# EAGLE board Anoloctive (EAGLE 9.6.2)
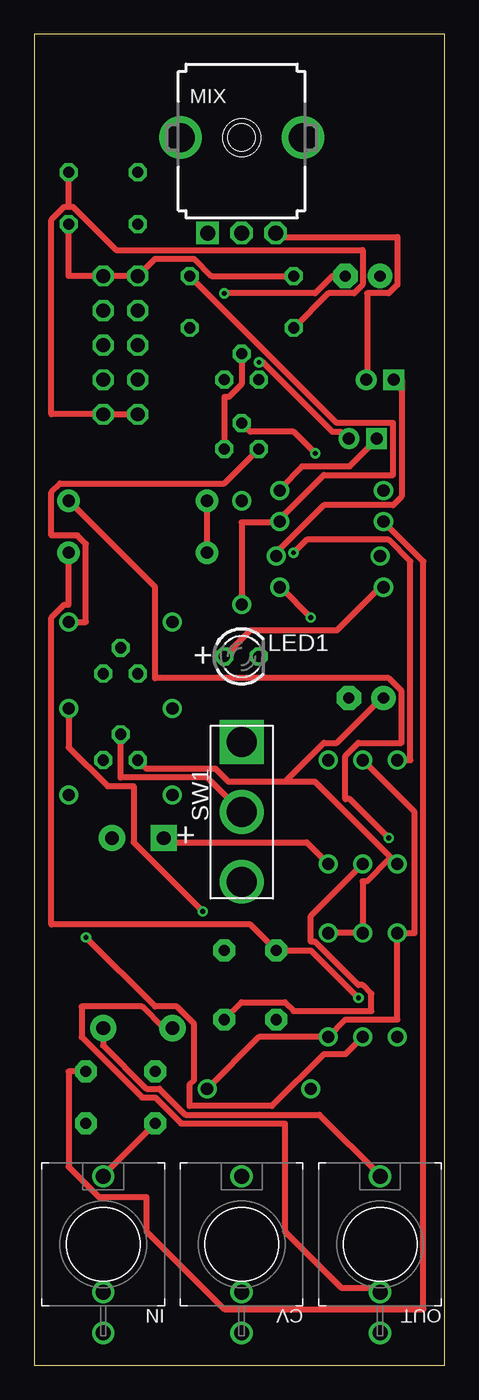
[diagram p0: board, top side]
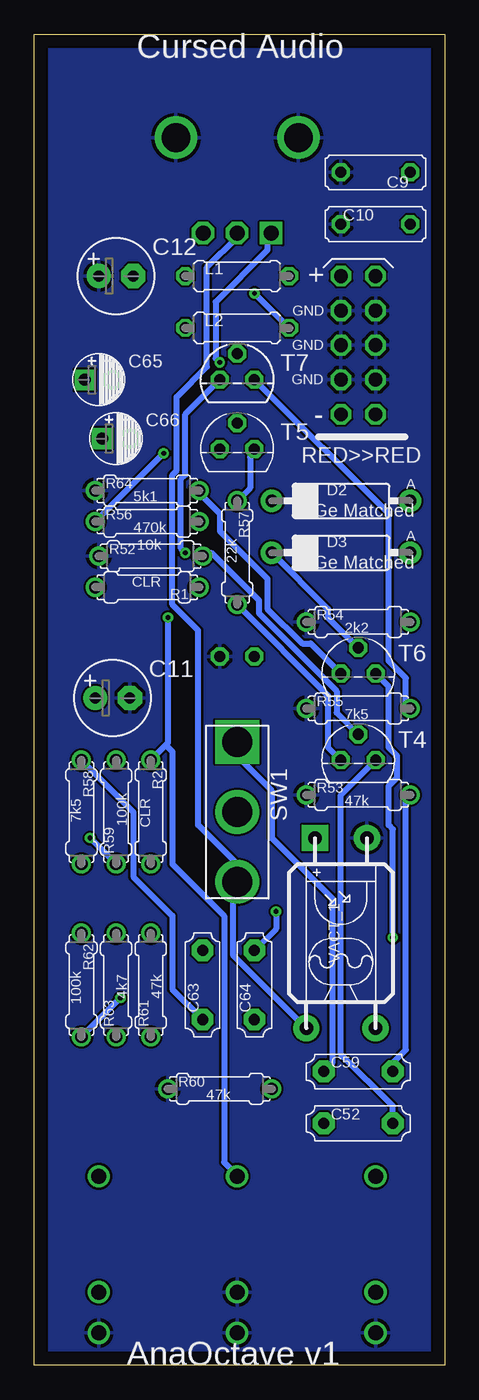
[diagram p1: board, bottom side, seen from below]

Size 30.15 x 97.78 mm. Coordinates in mm from the lower left corner, seen from the top.
Outline: 0,0 30.15,0 30.15,97.78 0,97.78 0,0
Copper layers (1*16): Top 0.035mm / dielectric 1.5mm / Bottom 0.035mm
Design rules "default": minimum track width 6mil, minimum drill 0.35mm, track to track 6mil, track to pad 6mil, pad to pad 6mil, via to via 6mil, smd to smd 6mil, copper to edge 40mil, drill to drill 6mil, minimum pad ring 10mil, minimum via ring 8mil, stop-mask expansion 4mil, vias tented up to drill 0mil, thermal gap 10mil
Net classes: 0 default: width 0.457 mm

## Footprints (pad centres in the part's own frame; a part is rotated, then mirrored left to right if it is on the bottom)
EURO_POWER_HEADER = drill 1.016 octagon: 1 -5.08,-1.27; 2 -5.08,1.27; 3 -2.54,-1.27; 4 -2.54,1.27; 5 0,-1.27; 6 0,1.27; 7 2.54,-1.27; 8 2.54,1.27; 9 5.08,-1.27; 10 5.08,1.27
C050-025X075 = drill 0.813 octagon: 1 -2.54,0; 2 2.54,0
E2,5-6 = drill 0.813 pad 1.778: + -1.27,0 | drill 0.813 pad 1.778 octagon: - 1.27,0
C5B2.5 = drill 0.813 pad 1.6 octagon: 1 -2.54,0; 2 2.54,0
E2-4 = drill 0.889 pad 1.524 square: + -1.016,0 | drill 0.889 pad 1.524: - 1.016,0
WQP-PJ301M-12_JACK = drill 1.1: P$1_TIP 0,5; P$2_SWITCH 0,-3.5; P$3_SLEEVE 0,-6.5
DO07 = drill 0.889 pad 1.651: A 5.08,0; C -5.08,0
0207/7 = drill 0.813 octagon: 1 -3.81,0; 2 3.81,0
LED3MM = drill 0.813 octagon: A -1.27,0; K 1.27,0
9MM_SNAP-IN_POT = drill 1.1 square: 1 -2.5,-7 | drill 1.1 octagon: 2 0,-7; 3 2.5,-7 | drill 2.1 pad 2.794: CHASSIS1 -4.5,0; CHASSIS2 4.5,0
0207/7' = drill 0.889: 1 -3.81,0; 2 3.81,0
M9040P = drill 2.2 pad 2.9 square: 1 5.144,0 | drill 2.2 pad 2.9: 2 0,0; 3 -5.118,0
TO92 = drill 0.813 octagon: 1 1.27,0; 2 0,1.905; 3 -1.27,0
_LDR = drill 1 pad 1.93: 1 -6.985,2.54; 2 -6.985,-2.54; CATHODE 6.985,-1.905 | drill 1 pad 1.93 square: ANODE 6.985,1.905

## Placement (x,y rotation side)
C8  EURO_POWER_LOCKSKINNY  [EURO_POWER_HEADER]  6.35,74.93 90 bottom
C9  [C050-025X075]  5.08,87.63 180 bottom
C10  [C050-025X075]  5.08,83.82 0 bottom
C11  [E2,5-6]  24.38,49.02 0 bottom
C12  [E2,5-6]  24.13,80.01 0 bottom
C52  100n  [C5B2.5]  6.35,17.78 0 bottom
C59  100n  [C5B2.5]  6.35,21.59 0 bottom
C63  47n  [C5B2.5]  17.78,27.94 90 bottom
C64  47n  [C5B2.5]  13.97,27.94 90 bottom
C65  [E2-4]  25.4,72.39 0 bottom
C66  [E2-4]  24.13,68.07 0 bottom
CV  THONKICONNNEW  [WQP-PJ301M-12_JACK]  15.24,8.89 0 top
D2  Ge Matched  [DO07]  7.62,63.5 0 bottom
D3  Ge Matched  [DO07]  7.62,59.69 0 bottom
IN  THONKICONNNEW  [WQP-PJ301M-12_JACK]  5.08,8.89 0 top
L1  [0207/7]  15.24,80.01 0 bottom
L2  [0207/7]  15.24,76.2 0 bottom
LED1  TLLG4400  [LED3MM]  15.24,52.07 0 top
MIX  100k  [9MM_SNAP-IN_POT]  15.24,90.17 0 top
OUT  THONKICONNNEW  [WQP-PJ301M-12_JACK]  25.4,8.89 0 top
R1  CLR  [0207/7']  21.84,57.15 180 bottom
R2  CLR  [0207/7']  21.59,40.64 270 bottom
R52  10k  [0207/7']  21.59,59.44 0 bottom
R53  47k  [0207/7']  6.35,41.91 0 bottom
R54  2k2  [0207/7']  6.35,54.61 0 bottom
R55  7k5  [0207/7']  6.35,48.26 0 bottom
R56  470k  [0207/7']  21.84,61.98 0 bottom
R57  22k  [0207/7']  15.24,59.69 270 bottom
R58  7k5  [0207/7']  26.67,40.64 270 bottom
R59  100k  [0207/7']  24.13,40.64 90 bottom
R60  47k  [0207/7']  16.51,20.32 0 bottom
R61  47k  [0207/7']  21.59,27.94 90 bottom
R62  100k  [0207/7']  26.67,27.94 270 bottom
R63  4k7  [0207/7']  24.13,27.94 90 bottom
R64  5k1  [0207/7']  21.84,64.26 0 bottom
SW1  [M9040P]  15.24,40.64 90 top
T4  2n5457  [TO92]  6.35,44.45 0 bottom
T5  2N5089  [TO92]  15.24,67.31 0 bottom
T6  2n5089  [TO92]  6.35,50.8 0 bottom
T7  2N5087  [TO92]  15.24,72.39 0 bottom
VACT_1  [_LDR]  7.62,31.75 90 bottom

## Library data of the parts
C8 CV IN MIX OUT = MusicThingModular
C9 C10 = hexxxxrcl; SPICEPREFIX: C
C11 C12 = BeagleBone_Blue_R3
C52 C59 C63 C64 = hexcapacitor-wima
C65 C66 = hexresistor; SPICEPREFIX: C
D2 D3 = diode
L1 L2 = hexxxxrcl; SPICEPREFIX: L
LED1 = led; MF: VISHAY SEMICONDUCTOR; OC_FARNELL: 1612435
R1 R2 R52-R64 = hexresistor; SPICEPREFIX: R
SW1 = pedals-switches
T4 = transistor-fet
T5 T6 = transistor
T7 = transistor-pnp
VACT_1 = pedals-vactrol

## Nets
+12V: C11.+ L1.2 R56.2 R57.2 R58.2 R61.2 R63.2 T4.3
-12V: C12.- L2.2
GND: C8.3 C8.4 C8.5 C8.6 C8.7 C8.8 C9.2 C10.1 C11.- C12.+ CV.P$2_SWITCH CV.P$3_SLEEVE IN.P$3_SLEEVE LED1.K MIX.CHASSIS1 MIX.CHASSIS2 OUT.P$3_SLEEVE R52.1 R53.1 R54.1 R55.1 R60.1 R64.1 VACT_1.CATHODE
N$1: LED1.A R1.2
N$2: OUT.P$1_TIP VACT_1.2
N$3: R2.2 VACT_1.ANODE
N$6: CV.P$1_TIP R1.1 R2.1
N$23: C52.2 T4.1
N$42: C8.9 C8.10 C10.2 L1.1
N$45: C8.1 C8.2 C9.1 L2.1
N$92: R57.1 T5.1 T7.2
N$93: R54.2 T5.3
N$95: C59.2 R53.2 R56.1 T5.2
N$96: C64.2 R55.2 T7.1
N$97: C64.1 D2.A R59.1
N$100: MIX.2 OUT.P$2_SWITCH SW1.3 VACT_1.1
N$103: R59.2 R60.2 R61.1 R62.1
N$104: D2.C D3.C T6.2
N$105: C65.- MIX.3
N$106: C66.+ R64.2 T6.3
N$107: C66.- MIX.1
N$108: R63.1 T6.1
N$109: C59.1 SW1.1
N$110: C63.1 R58.1 T7.3
N$111: C65.+ R52.2 SW1.2 T4.2
N$112: C63.2 D3.A R62.2
N$115: C52.1 IN.P$1_TIP

## Tracks (layer width: path | path; a pad name or v marks a point on that pad's centre or on a via)
+12V
  Top 0.457: R61.2 R63.2 24.13,35.56 24.45,35.56 26.04,37.15 R58.2 20.64,42.86 18.41,42.86 | T4.3 8.26,43.82 13.34,43.82 14.29,42.86 18.41,42.86 | 18.41,42.86 21.27,45.72 22.23,45.72 25.4,48.9 C11.+ | L1.2 22.23,69.21 26.35,69.21 26.35,65.41 21.27,65.41 18.1,62.23 R56.2 17.78,61.91 15.24,61.91 R57.2
  Bottom 0.457: T4.3 8.57,45.4 8.57,49.21 R57.2
-12V  (via drill 0.35)
  Top 0.457: v13.97,78.74 20.64,78.74 21.91,80.01 C12.-
  Bottom 0.457: v13.97,78.74 L2.2
GND
  pour Bottom: 0,97.79 30.48,97.79 30.48,0 0,0
N$1
  Top 0.457: LED1.A 15.88,53.98 22.23,53.98 25.4,57.15 R1.2
N$2
  Top 0.457: VACT_1.2 5.08,23.5 8.26,20.32 9.21,20.32 11.11,18.41 20.95,18.41 25.4,13.97 OUT.P$1_TIP
N$3
  Top 0.457: R2.2 20,38.42 9.84,38.42 VACT_1.ANODE
N$6  (via drill 0.35)
  Top 0.457: v20.32,54.93 18.1,57.15 R1.1
  Bottom 0.457: 20.48,45.56 20.32,45.72 v20.32,54.93 | 20.48,45.56 R2.1 | 20.48,45.56 20,45.09 20,36.83 16.19,33.02 16.19,14.92 15.24,13.97 CV.P$1_TIP
N$23
  Bottom 0.457: T4.1 7.62,41.91 7.62,22.86 3.81,19.05 C52.2
N$42
  Top 0.457: C10.2 2.54,80.01 C8.9 C8.10 8.89,81.28 11.75,81.28 13.02,80.01 L1.1
N$45
  Top 0.457: 2.54,85.09 C9.1 | 2.54,85.09 2.22,85.09 1.27,84.14 1.27,69.85 C8.1 C8.2 | L2.1 21.59,78.74 23.5,78.74 24.13,79.38 24.13,81.91 6.03,81.91 2.86,85.09 2.54,85.09
N$92
  Top 0.457: T5.1 13.97,71.12 14.29,71.12 15.24,72.07 T7.2
  Bottom 0.457: R57.1 14.29,64.45 14.29,66.67 13.97,66.99 T5.1
N$93
  Top 0.457: T5.3 13.97,64.77 1.91,64.77 1.27,64.14 1.27,60.96 3.17,60.96 3.81,60.33 3.81,54.61 R54.2
N$95  (via drill 0.35)
  Top 0.457: T5.2 15.88,68.58 19.05,68.58 v20.64,66.99 | R56.1 28.57,59.05 28.57,4.13 13.97,4.13 8.26,9.84 8.26,12.38 4.76,12.38 2.54,14.61 2.54,21.59 C59.2
  Bottom 0.457: R56.1 v20.64,66.99 | R53.2 2.86,41.59 2.86,23.18 3.81,22.22 C59.2
N$96  (via drill 0.35)
  Top 0.457: v12.38,33.34 7.3,38.42 7.3,42.55 5.4,42.55 2.54,45.4 R55.2
  Bottom 0.457: T7.1 4.13,62.55 4.13,51.75 2.86,50.48 2.86,48.58 R55.2 | C64.2 12.38,32.07 v12.38,33.34
N$97  (via drill 0.35)
  Top 0.457: R59.1 20.32,33.02 20.32,31.11 20.64,31.11 23.81,27.94 24.13,27.94 24.77,27.3 24.77,26.04 19.05,26.04 18.41,26.67 15.24,26.67 C64.1 | D2.A 8.89,57.15 8.89,50.48 26.04,50.48 26.99,49.53 26.99,45.72 23.81,45.72 22.86,44.77 22.86,41.59 23.18,41.59 v26.04,38.74
  Bottom 0.457: R59.1 v26.04,38.74
N$100
  Top 0.457: VACT_1.1 9.53,24.77 7.94,26.35 3.49,26.35 3.49,24.13 7.94,19.68 8.89,19.68 10.79,17.78 18.41,17.78 18.41,9.84 22.54,5.71 25.08,5.71 OUT.P$2_SWITCH
  Bottom 0.457: MIX.2 15.24,82.87 17.46,80.64 17.46,73.34 19.68,71.12 19.68,65.72 20,65.41 20,55.88 18.1,53.98 18.1,39.69 15.24,36.83 SW1.3 15.56,36.83 15.56,30.16 VACT_1.1
N$103
  Top 0.457: R60.2 16.51,24.13 R61.1 22.86,25.4 26.67,25.4 R62.1 27.94,31.75 27.94,40.64 R59.2
N$104
  Top 0.457: D3.C D2.C
  Bottom 0.457: T6.2 8.57,54.93 8.57,55.56 D3.C
N$105
  Top 0.457: C65.- 24.45,72.39 24.45,78.74 26.04,78.74 26.67,79.38 26.67,82.87 17.78,82.87 MIX.3
N$106
  Top 0.457: C66.+ 25.08,67.94 23.18,66.04 19.68,66.04 18.1,64.45 R64.2
  Bottom 0.457: T6.3 9.84,53.02 10.48,53.02 13.02,55.56 13.02,57.79 16.51,61.28 16.51,62.55 17.78,63.82 17.78,64.14 R64.2
N$107  (via drill 0.35)
  Top 0.457: v16.51,73.66 16.83,73.66 21.91,68.58 22.54,68.58 22.86,68.26 C66.-
  Bottom 0.457: v16.51,73.66 16.83,73.98 16.83,78.1 13.02,81.91 13.02,82.87 MIX.1
N$108  (via drill 0.35)
  Top 0.457: v3.81,31.43 8.89,26.35 10.48,26.35 11.75,25.08 11.75,20.95 11.43,20.64 11.43,19.05 17.46,19.05 21.27,22.86 22.86,22.86 R63.1
  Bottom 0.457: T6.1 4.13,49.85 4.13,45.4 3.49,44.77 3.49,43.18 4.13,42.55 4.13,39.69 3.81,39.37 v3.81,31.43
N$109
  Bottom 0.457: C59.1 8.26,22.22 8.26,34.29 12.7,38.74 12.7,42.23 15.24,44.77 SW1.1
N$110  (via drill 0.35)
  Top 0.457: v19.05,59.69 20,60.64 26.04,60.64 27.62,59.05 27.62,44.45 R58.1
  Bottom 0.457: T7.3 19.05,69.85 19.05,65.41 19.37,65.09 19.37,60.01 v19.05,59.69 | C63.1 20,27.62 20,33.02 22.86,35.88 22.86,40.64 R58.1
N$111
  Top 0.457: T4.2 6.35,43.18 12.7,43.18 SW1.2 | C65.+ 26.99,72.39 26.99,63.82 26.35,63.18 21.27,63.18 17.78,59.69 R52.2
  Bottom 0.457: T4.2 7.94,47.94 7.94,49.53 13.65,55.25 13.65,56.2 17.14,59.69 17.78,59.69 R52.2
N$112  (via drill 0.35)
  Top 0.457: v23.81,26.99 20.32,30.48 C63.2 15.88,32.38 1.27,32.38 1.27,54.93 2.22,55.88 2.54,55.88 D3.A
  Bottom 0.457: v23.81,26.99 R62.2
N$115
  Top 0.457: C52.1 5.08,13.97 IN.P$1_TIP

## Text on the board
tPlace: + | +
bPlace: Cursed Audio | AnaOctave v1